# Altium PCB PCB3.PcbDoc
Units mm, origin at the board's own origin, x right, y up, seen from the top; angles counter-clockwise.
Board outline 92.46 x 57.02 mm, 2 copper layers (Top Layer, Bottom Layer); 9 components, 8 nets, 54 pads, 0 vias.
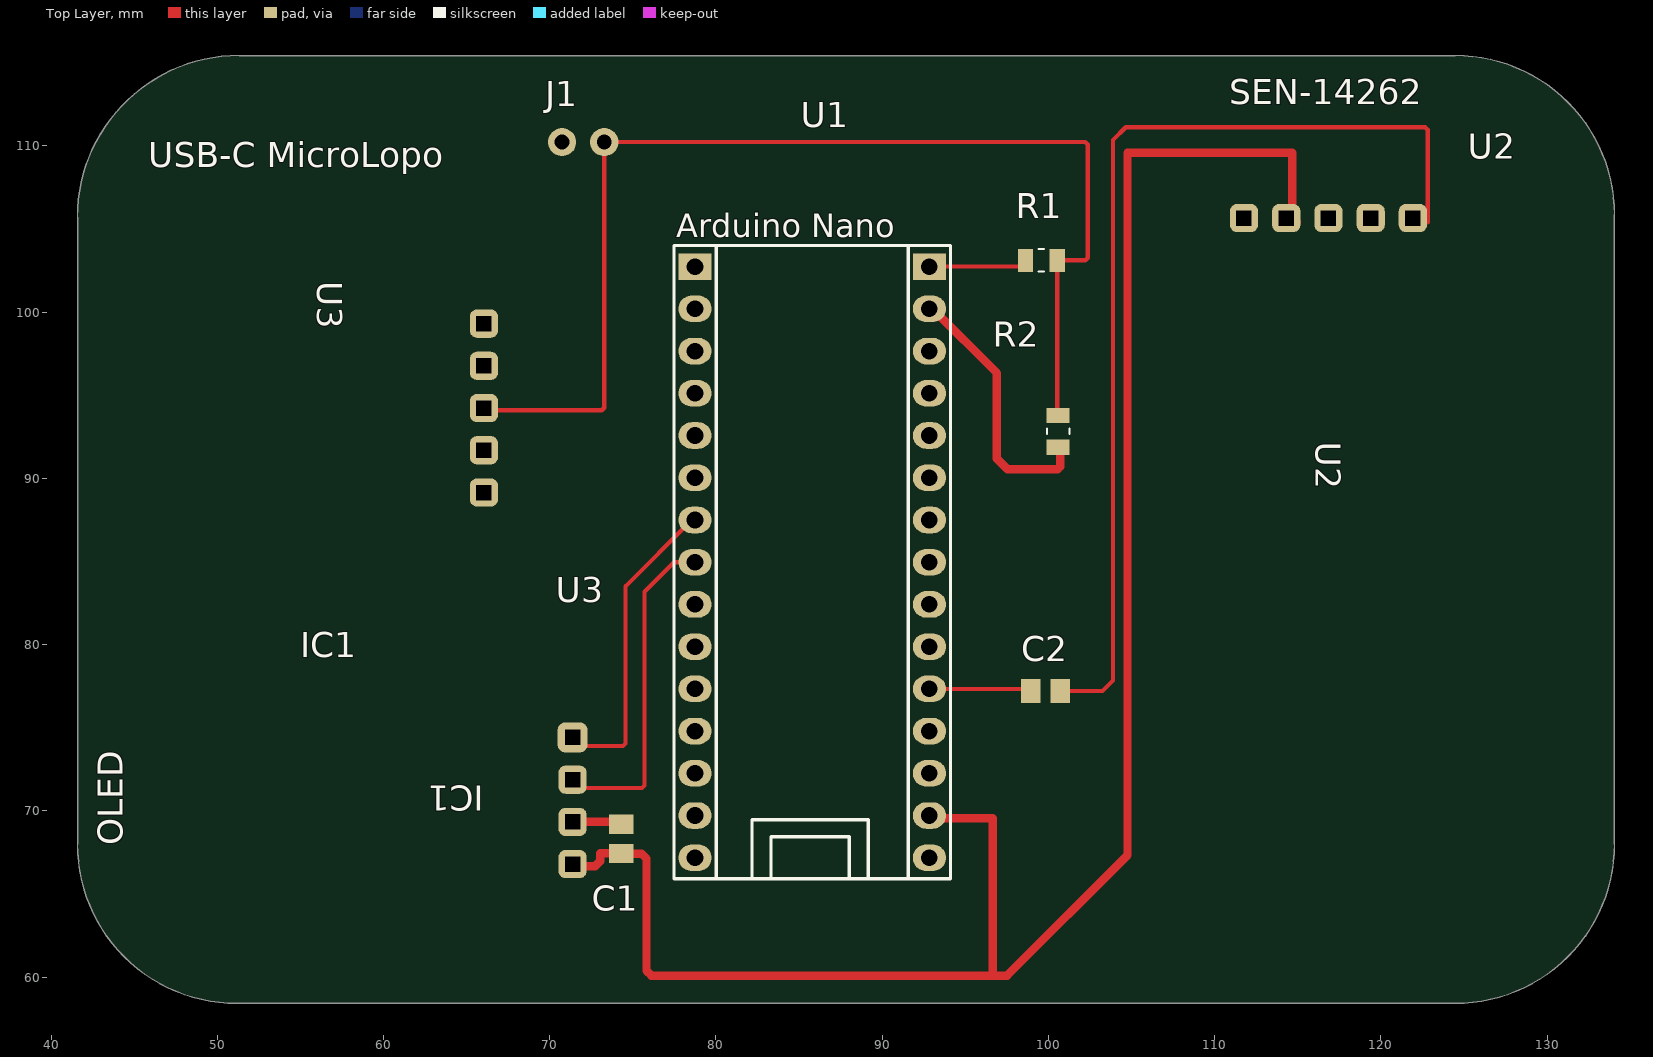
[diagram p0: Top Layer view]
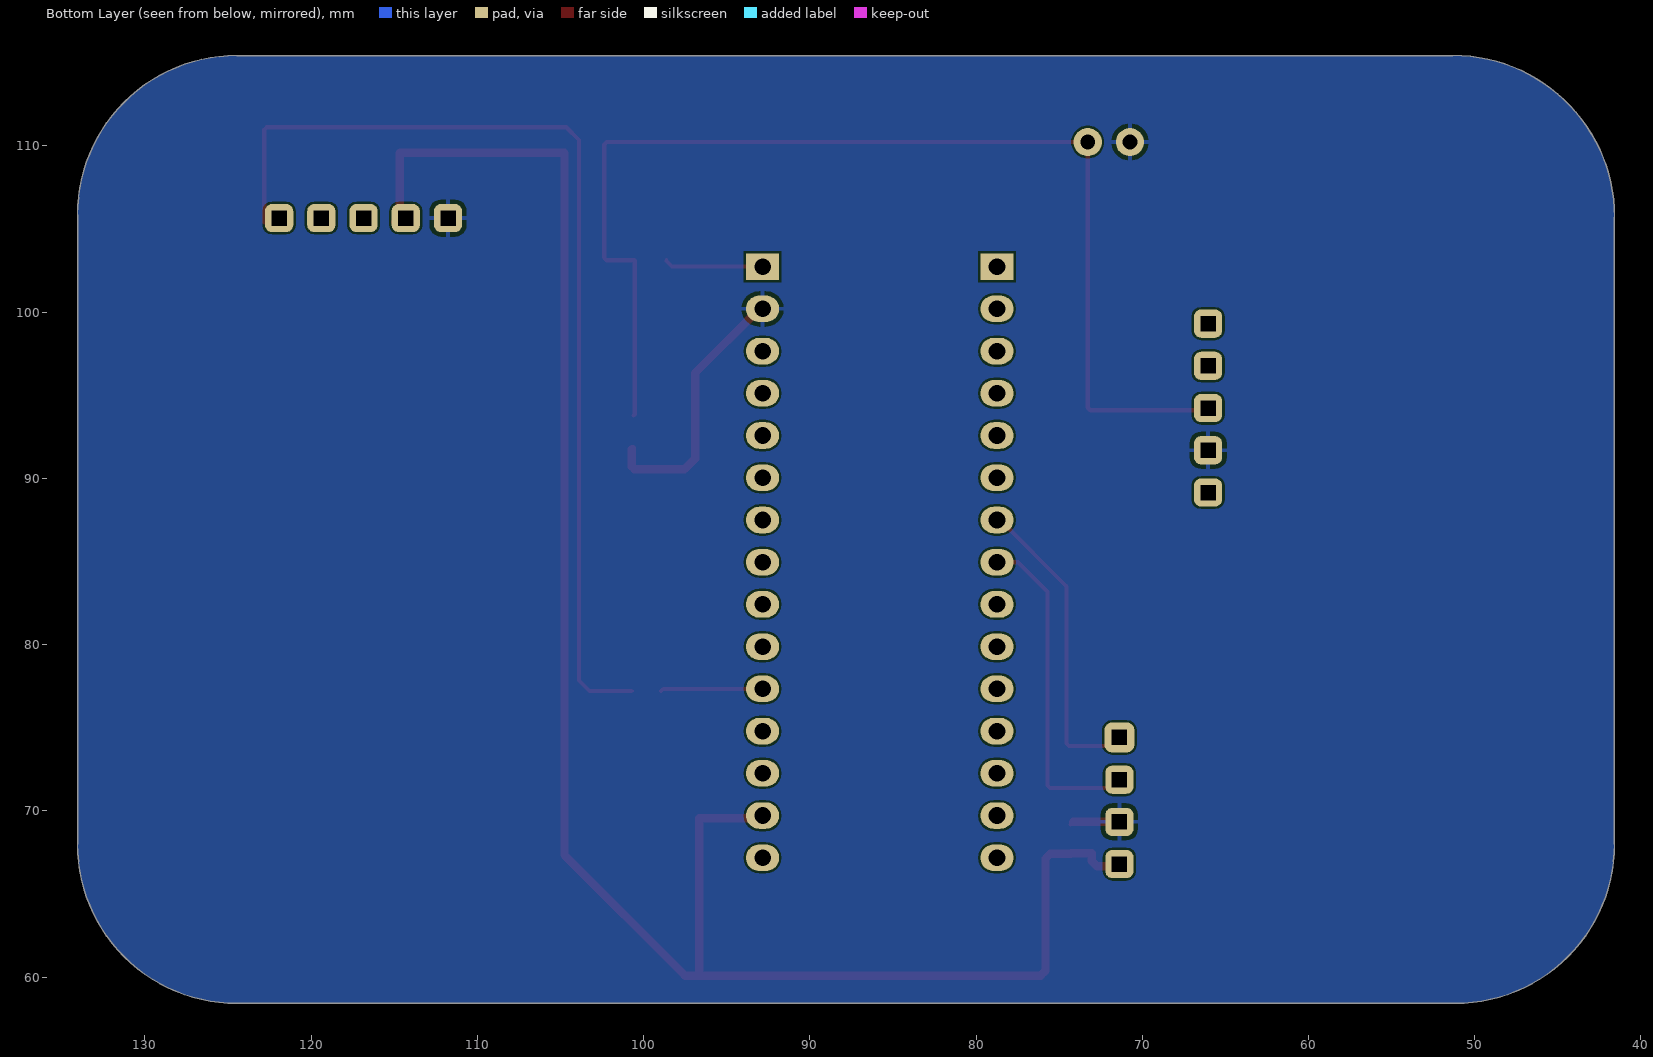
[diagram p1: Bottom Layer view, seen from below]
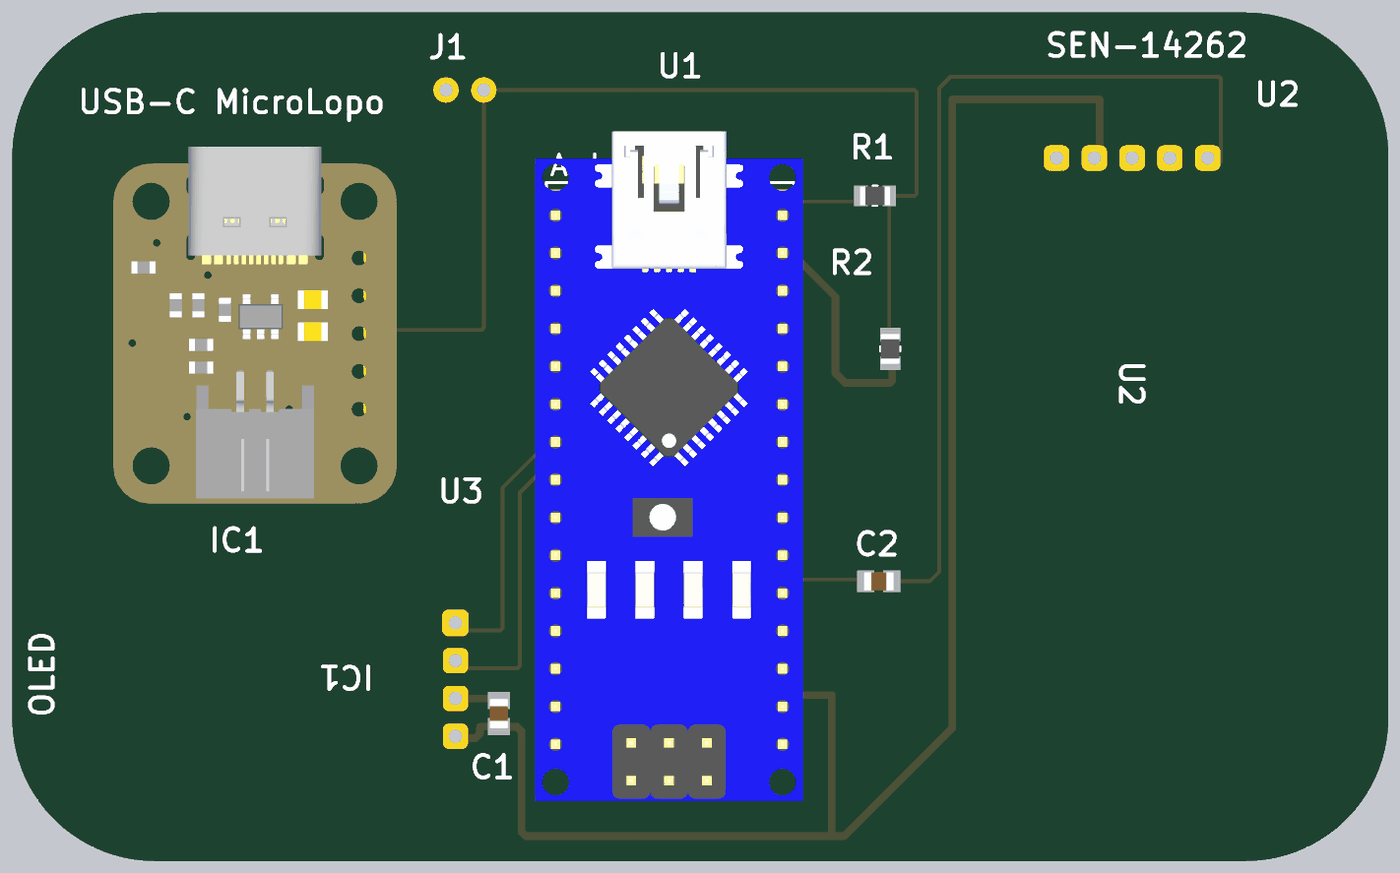
[diagram p2: 3D render of the assembled board from above, using the file's embedded part models]

## Layer stack, top to bottom
Top Solder: solder mask 0.0102, Solder Resist, Dk 3.5
Top Layer: signal copper 0.0356
Dielectric 1: dielectric 0.32, FR-4, Dk 4.8
Bottom Layer: signal copper 0.0356
Bottom Solder: solder mask 0.0102, Solder Resist, Dk 3.5

## Board outline
51.181,58.42 124.46,58.42 ccw(c124.46,68.008) 134.048,68.008 134.048,105.855 ccw(c124.46,105.855) 124.46,115.443 51.308,115.443 ccw(c51.308,105.728) 41.593,105.727 41.592,68.008 ccw(c51.181,68.008)

## Design rules (kind name [scope] priority, off if disabled: settings)
Clearance [All] p1: gap=0.127 ignorepadtopadclearanceinfootprint=FALSE
PolygonConnect [All] p1: connectstyle=Relief reliefconductorwidth=0.254 reliefentries=4 polygonreliefangle="90 Angle" airgapwidth=0.254
RoutingVias [All] p1: holewidth=0.711 width=1.27 viastyle="Through Hole" minholewidth=0.711 minwidth=1.27 maxholewidth=0.711 maxwidth=1.27
SilkToSolderMaskClearance [IsPad] p1: minsilkscreentomaskgap=0.127 clearancetoexposedcopper=TRUE
SolderMaskExpansion [All] p1: expansion=0 istentingtop=FALSE
SupplyNets "Schematic Supply Nets" [InNet('GND')] p1: voltage=0.000
Width [All] p1: maxlimit=0.762 minlimit=0.254 preferedwidth=0.254 minimp=50.000000 maximp=50.000000 favimp=50.000000
29 further rules are at their usual default settings.

## Components (designator, comment, footprint, x,y, rotation, side; value= is the part's Value field where it differs from the comment)
C1 "100u" CAP 74.295,68.326 r270 top
C2 "10u" CAP 99.822,77.216 r0 top
IC1 "MDOB048064AV-WI" MDOB048064AV-WI 71.12,78.613 r180 top
J1 "JST-PH 2-pin Battery Connector" "JST-PH 2-PIN CONNECTOR" 73.279,110.236 r270 top
R1 "2.2k" RES 99.568,103.124 r0 top
R2 "2.2k" RES 100.584,92.837 r90 top
U1 "Arduino Nano ESP 32" "PCBCOMPONENT_1 - DUPLICATE" 85.598,83.947 r90 top
U2 "SEN-14262" SEN-14262 117.729,98.806 r270 top
U3 "USB-C Charger Module" ADAFRUIT-4410 62.23,85.852 r180 top

## Footprints (in the part's own frame and the unit in brackets; to place one, negate y for a bottom-side part, rotate by r counter-clockwise, add the part's x,y. Pads: shape width x height; smd on the part's side, far side on the other; paste and mask are expansions set on the pad)
ADAFRUIT-4410 [mm]
  rrect50% 1.7x1.7 hole 0.9 square: 1(-3.81,-3.302) 2(-3.81,-5.842) 3(-3.81,-8.382) 4(-3.81,-10.922) 5(-3.81,-13.462)
  body extent -5.21,-20.56 13.84,3.42, height 6.37
CAP [mm]
  rect 1.16x1.47 smd: 1(-0.88,0) 2(0.88,0)
  body extent -1,-0.63 1,0.63, height 0.94
"JST-PH 2-PIN CONNECTOR" [mm]
  round 1.7 hole 0.9: 1(0,0) 2(0,-2.54)
MDOB048064AV-WI [mm]
  rrect50% 1.7x1.7 hole 0.9 square: 1(-0.254,11.811) 2(-0.254,9.271) 3(-0.254,6.731)
  rrect50% 1.8x1.8 hole 0.9 square: 4(-0.254,4.191)
  body extent -1.27,0.25 25.63,16.15, height 2.54
"PCBCOMPONENT_1 - DUPLICATE" [mm]
  rect 1.6x2 hole 1: 1(18.796,6.858) 30(18.796,-7.239)
  oval 1.6x2 hole 1: 2(16.256,6.858) 3(13.716,6.858) 4(11.176,6.858) 5(8.636,6.858) 6(6.096,6.858) 7(3.556,6.858) 8(1.016,6.858) 9(-1.524,6.858) 10(-4.064,6.858) 11(-6.604,6.858) 12(-9.144,6.858) 13(-11.684,6.858) 14(-14.224,6.858) 15(-16.764,6.858) 16(-16.764,-7.239) 17(-14.224,-7.239) 18(-11.684,-7.239) 19(-9.144,-7.239) 20(-6.604,-7.239) 21(-4.064,-7.239) 22(-1.524,-7.239) 23(1.016,-7.239) 24(3.556,-7.239) 25(6.096,-7.239) 26(8.636,-7.239) 27(11.176,-7.239) 28(13.716,-7.239) 29(16.256,-7.239)
  silkscreen extent -18.03,-8.51 20.07,8.13, body extent -21.5,-9.13 23.49,8.87, height 15.14
RES [mm]
  rect 0.92x1.38 smd: 1(-0.955,0) 2(0.955,0)
  silkscreen extent -0.17,-0.68 0.17,0.68, body extent -1,-0.63 1,0.63, height 0.6
SEN-14262 [mm]
  rrect50% 1.7x1.7 hole 0.9 square: 1(-6.858,4.191) 2(-6.858,1.651) 3(-6.858,-0.889) 4(-6.858,-3.429) 5(-6.858,-5.969)
  body extent -8.13,-12.38 35.62,10.6, height 2.54

## Part data
C1 C2: library part cap, "capacitor", Package="2012 AVX", Check_prices=https://www.snapeda.com/parts/0805YC103J4T2A/AVX/view-part/?ref=eda, MF=AVX, MP=0805YC103J4T2A, SnapEDA_Link=https://www.snapeda.com/parts/0805YC103J4T2A/AVX/view-part/?ref=snap
IC1: "LED"
J1: library part "JST-PH 2-pin connector", "JST-PH 2-pin LiPo Battery Connector"
R1 R2: library part res, "Resistor", Package="2012 Yageo", Check_prices=https://www.snapeda.com/parts/RC0805FR-07330RL/Yageo/view-part/?ref=eda, MF=Yageo, MP=RC0805FR-07330RL, SnapEDA_Link=https://www.snapeda.com/parts/RC0805FR-07330RL/Yageo/view-part/?ref=snap
U1: library part Component_1_1
U2: "Audio sensor"
U3: library part ADAFRUIT-4410, "ADAFRUIT 4410 MICROLIPO USBC MODULE"

## Nets (pads, with @x,y where several pads share a name; then routed paths per layer and width w, separated by ;. In a path a pad name is that pad's centre, name@x,y a point inside that pad or via, vN(x,y) a via of type N, cw(c..) or ccw(c..) an arc to the next point about the centre after c; other vN are vias at no path point)
3V3: C1.2 IC1.1 U1.17 U2.4 | length 113.8
  Top Layer w0.508: IC1.1 71.501,66.675 72.727,66.675 73.025,66.973 73.025,67.437 ; 73.034,67.446 C1.2 74.304,67.437 75.521,67.437 75.819,67.139 75.819,60.39 76.117,60.093 96.647,60.093 ; U1.17 92.986,69.574 96.647,69.574 96.647,60.093 ; U2.4@114.935,105.41 114.659,105.686 114.659,109.601 104.753,109.601 104.753,67.332 97.514,60.093 96.647,60.093
GND: C1.1 IC1.2 J1.2 R2.1 U1.29 U2.5 U3.2 | length 19.2
  Top Layer w0.254: C1.1@74.159,69.342 C1.1 ; U1.29 U1.29@93.037,100.203 ; 97.514,90.529 97.536,90.551 ; 100.562,90.551 100.711,90.7 ; R2.1 R2.1@100.711,91.755
  Top Layer w0.508: IC1.2 C1.1@74.159,69.342 ; U1.29@93.037,100.203 96.901,96.339 96.901,91.186 97.536,90.551 100.562,90.551 ; 100.711,90.7 R2.1@100.711,91.755
NetC2_1: C2.1 U1.20 | length 6.2
  Top Layer w0.254: U1.20 98.815,77.343 C2.1
NetC2_2: C2.2 U2.1 | length 60.8
  Top Layer w0.254: C2.2 103.251,77.216 103.886,77.851 103.886,110.363 104.648,111.125 122.66,111.125 122.809,110.976 122.809,105.41
NetIC1_3: IC1.3 U1.8 | length 19.7
  Top Layer w0.254: IC1.3@71.501,71.374 75.543,71.374 75.692,71.523 75.692,83.185 77.47,84.963 U1.8
NetIC1_4: IC1.4 U1.7 | length 18.4
  Top Layer w0.254: IC1.4@71.501,73.914 74.4,73.914 74.549,74.063 74.549,83.512 78.54,87.503 U1.7
NetR1_1: R1.1 U1.30 | length 6
  Top Layer w0.254: U1.30 98.28,102.743 98.613,103.076 R1.1
VBAT: J1.1 R1.2 R2.2 U3.3 | length 70.6
  Top Layer w0.254: U3.3 66.167,94.107 73.13,94.107 73.279,94.256 J1.1 102.213,110.236 102.362,110.087 102.362,103.273 102.213,103.124 R1.2 100.523,93.853 R2.2
pads on no net: U1.1 U1.2 U1.3 U1.4 U1.5 U1.6 U1.9 U1.10 U1.11 U1.12 U1.13 U1.14 U1.15 U1.16 U1.18 U1.19 U1.21 U1.22 U1.23 U1.24 U1.25 U1.26 U1.27 U1.28 U2.2 U2.3 U3.1 U3.4 U3.5

## Polygon pours and split planes (outlines as drawn)
GND on Bottom Layer "GND_L02_P000" (solid, pour order 0): 51.181,58.42 124.46,58.42 ccw(c124.46,68.008) 134.048,68.008 134.048,105.855 ccw(c124.46,105.855) 124.46,115.443 51.308,115.443 ccw(c51.308,105.728) 41.593,105.727 41.592,68.008 ccw(c51.181,68.008)

## Silkscreen, mask and mechanical layers (free items; w line width, h text height)
Top Overlay:
  text "SEN-14262" at 110.871,112.522 h1.52
  text "USB-C MicroLopo" at 45.847,108.712 h1.52
  text "OLED" at 44.323,67.945 h1.52 r90

## Text inside footprints (layer, text, board x,y; h text height)
U1: Top Overlay "Arduino Nano" at 77.597,104.521 h1.4